# Altium PCB PCB.PcbDoc
Units mm, origin at the board's own origin, x right, y up, seen from the top; angles counter-clockwise.
Board outline 96.52 x 79.25 mm, 4 copper layers (Top Layer, Signal Layer 1, Signal Layer 2, Bottom Layer), stack 0.778 mm thick; 87 components, 59 nets, 444 pads, 159 vias.
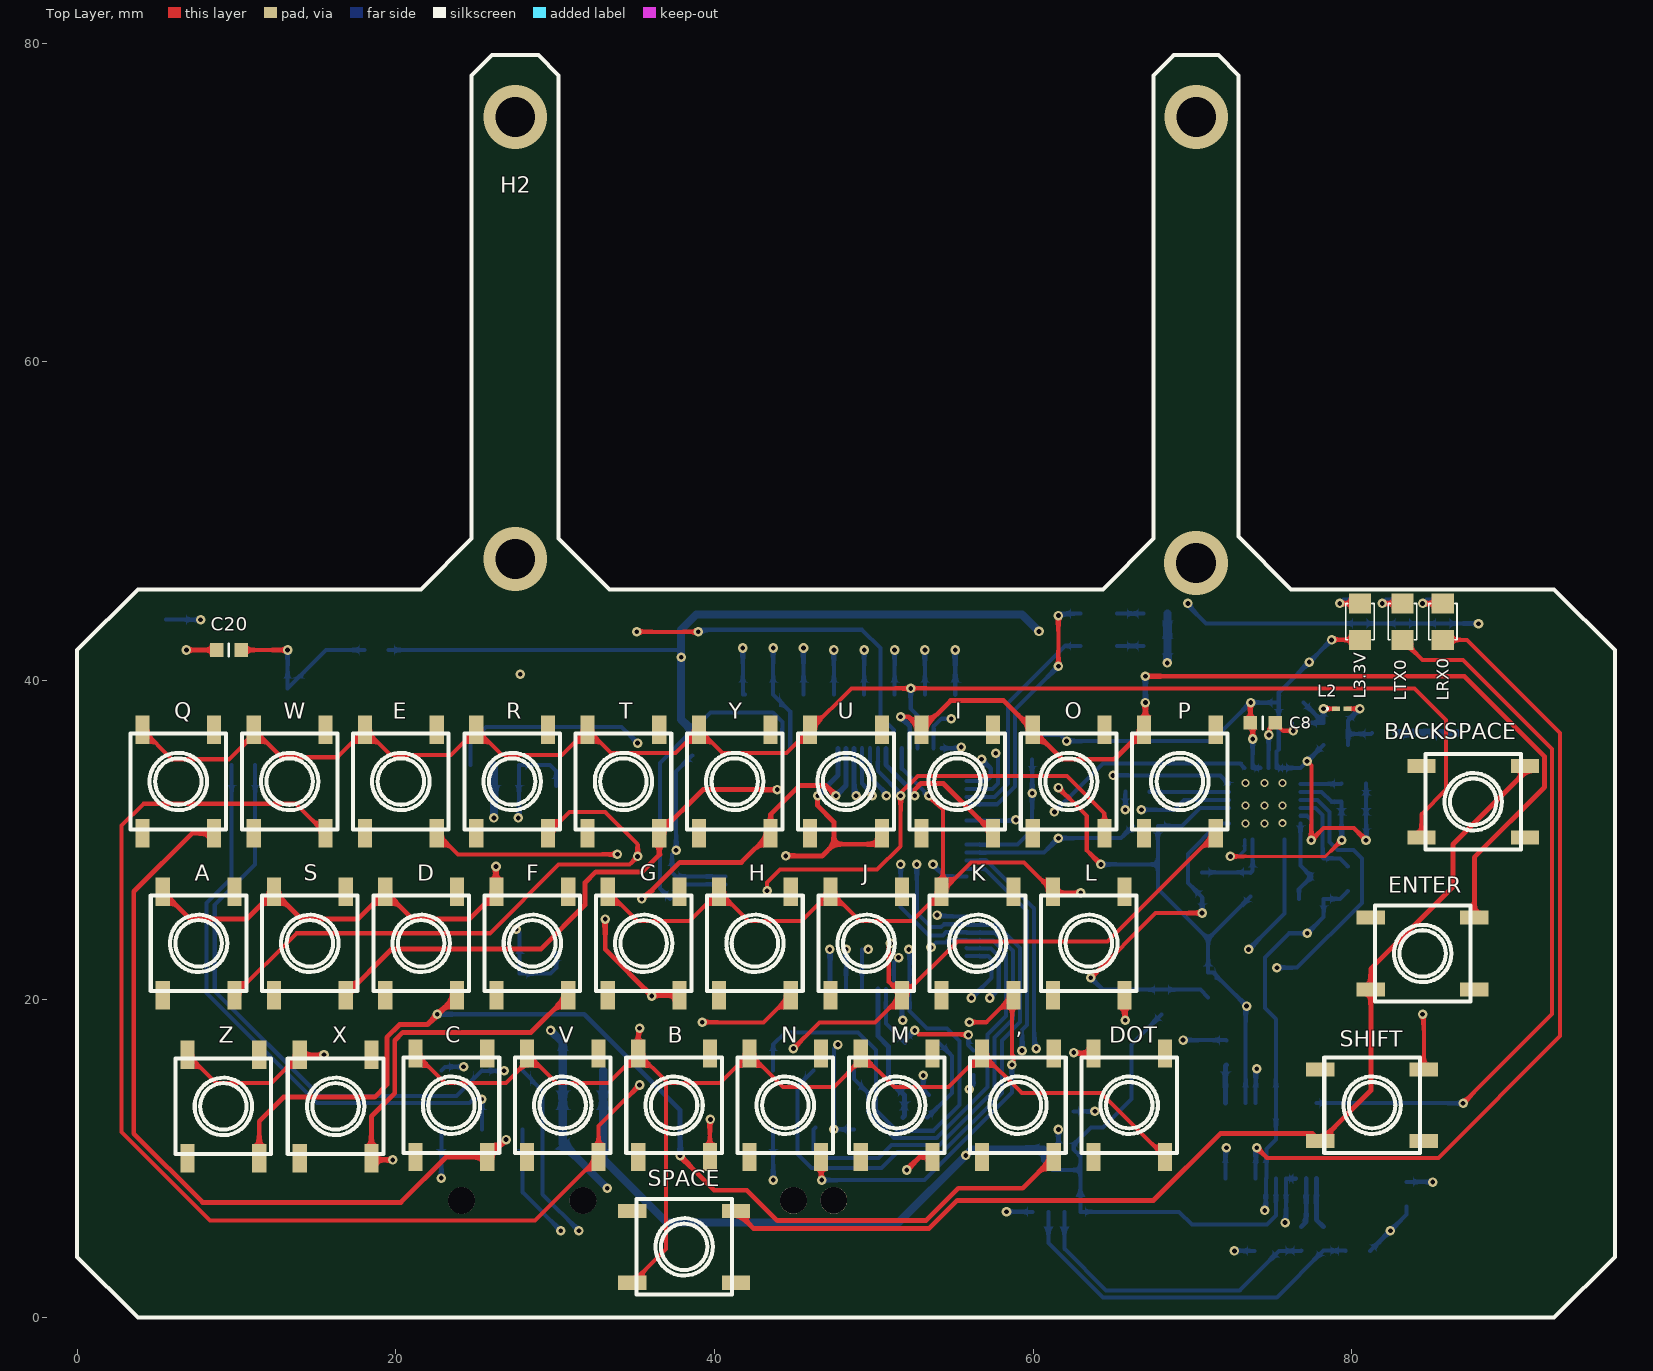
[diagram p0: Top Layer view]
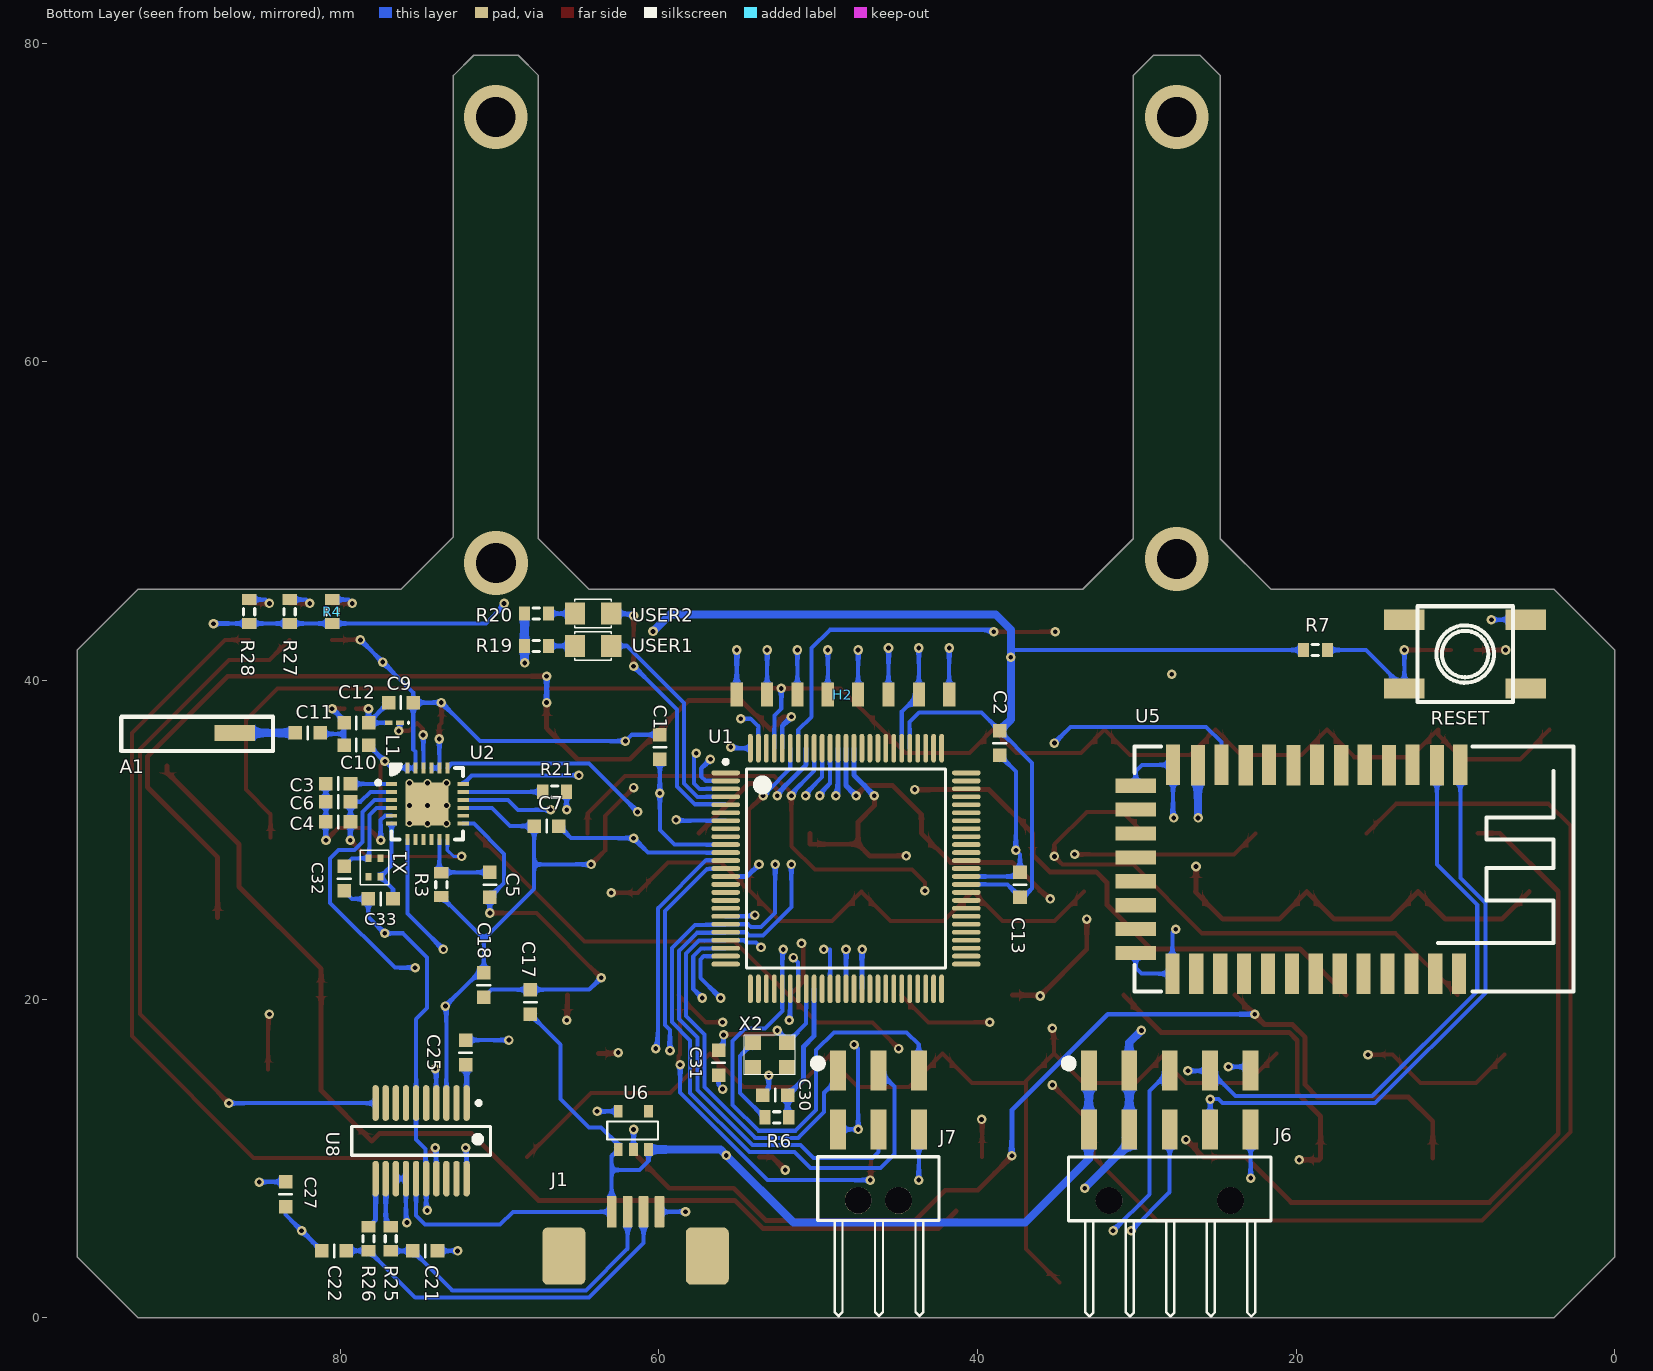
[diagram p1: Bottom Layer view, seen from below]
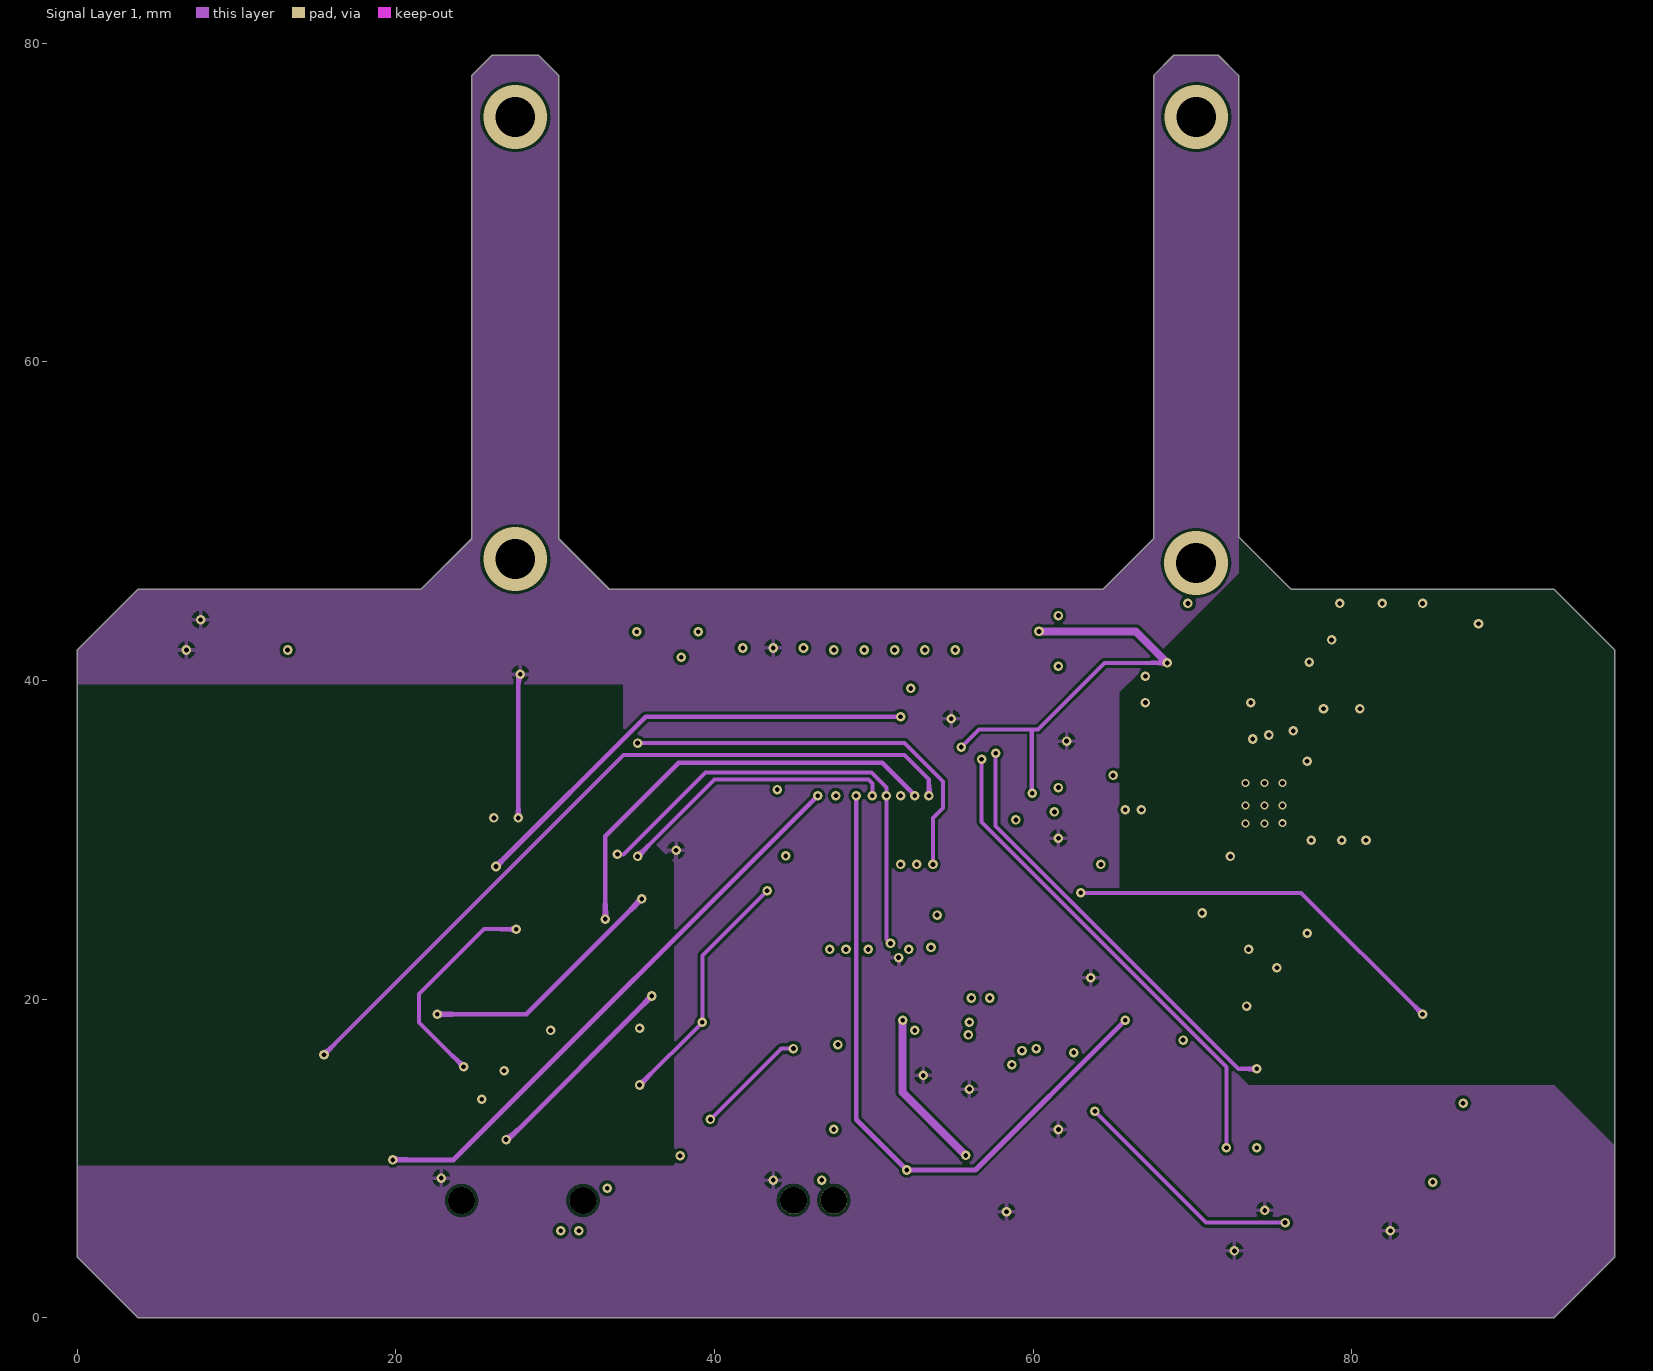
[diagram p2: Signal Layer 1]
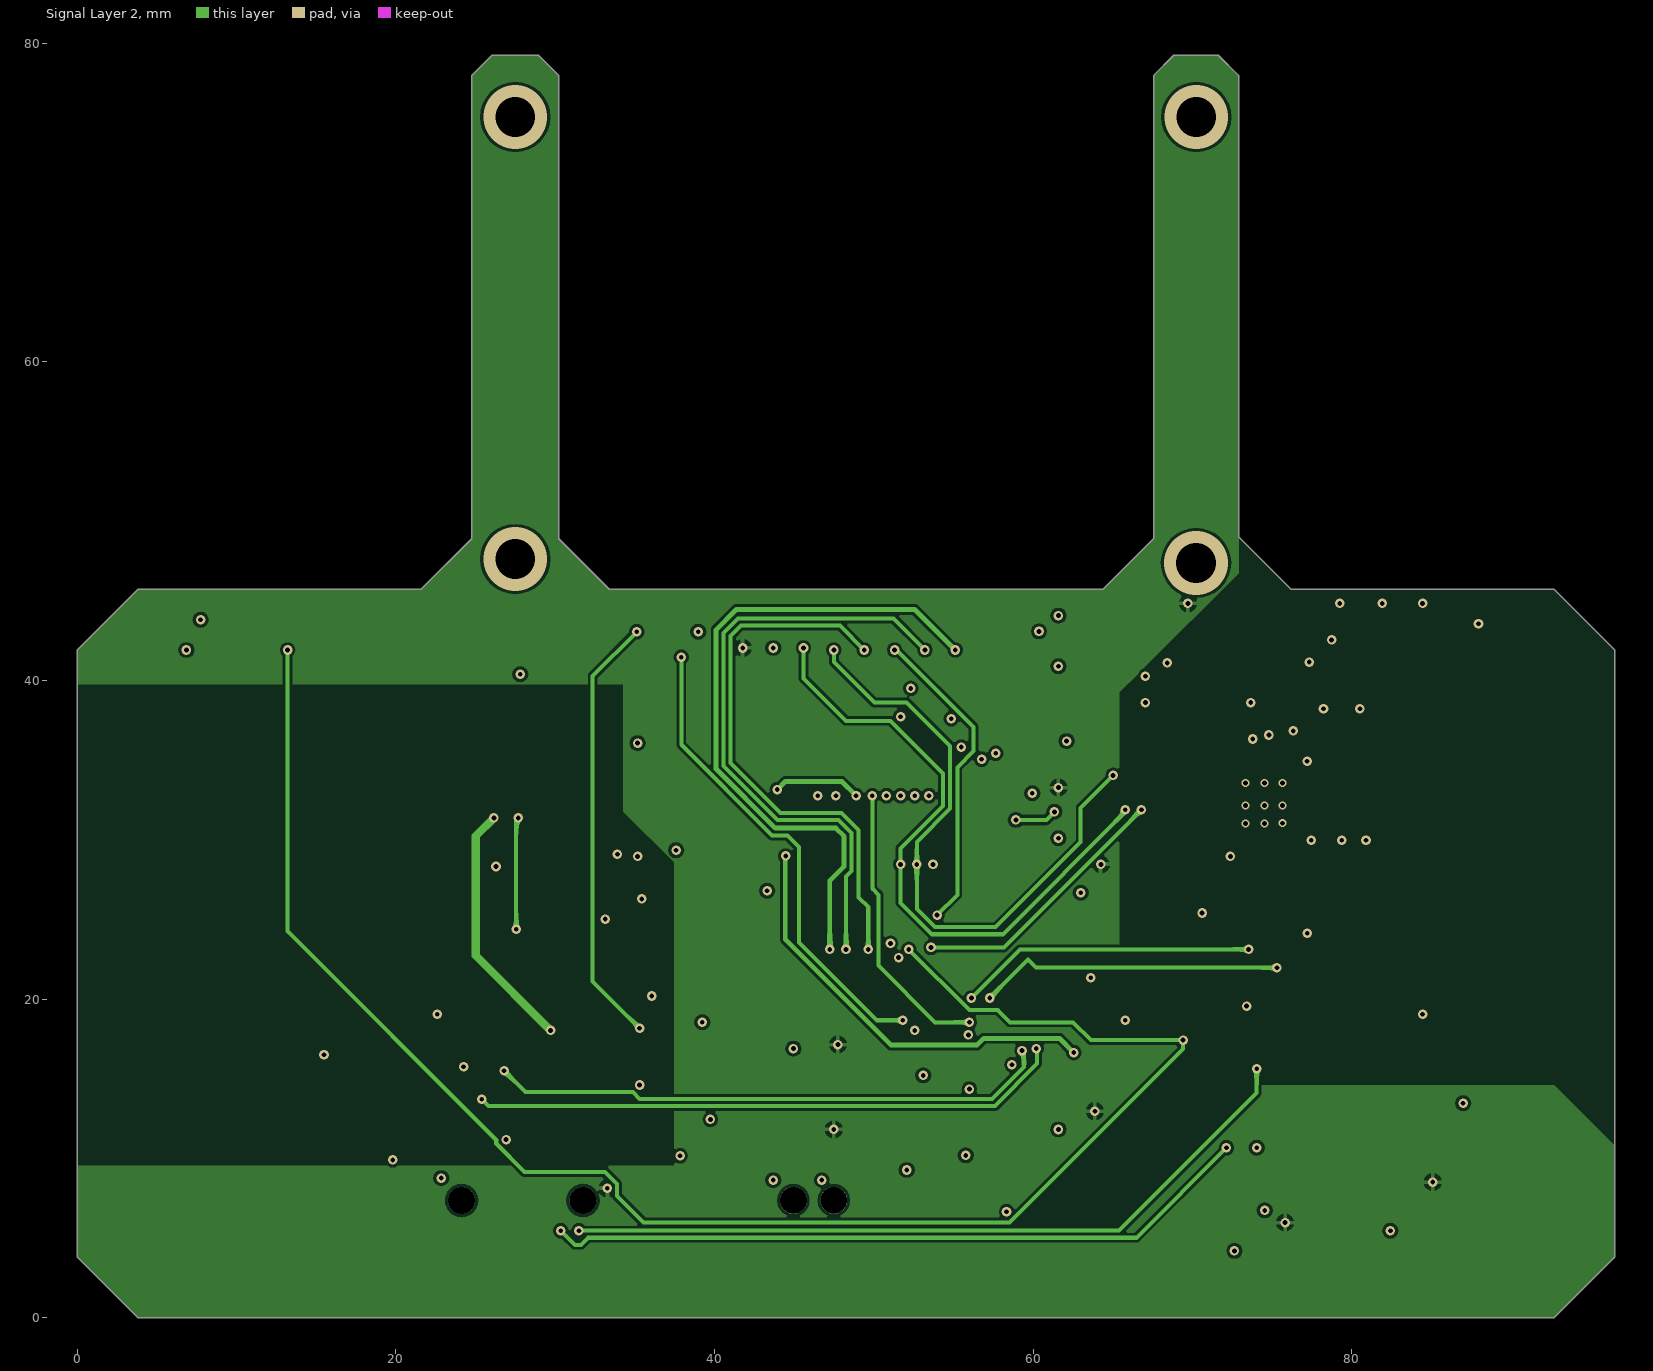
[diagram p3: Signal Layer 2]
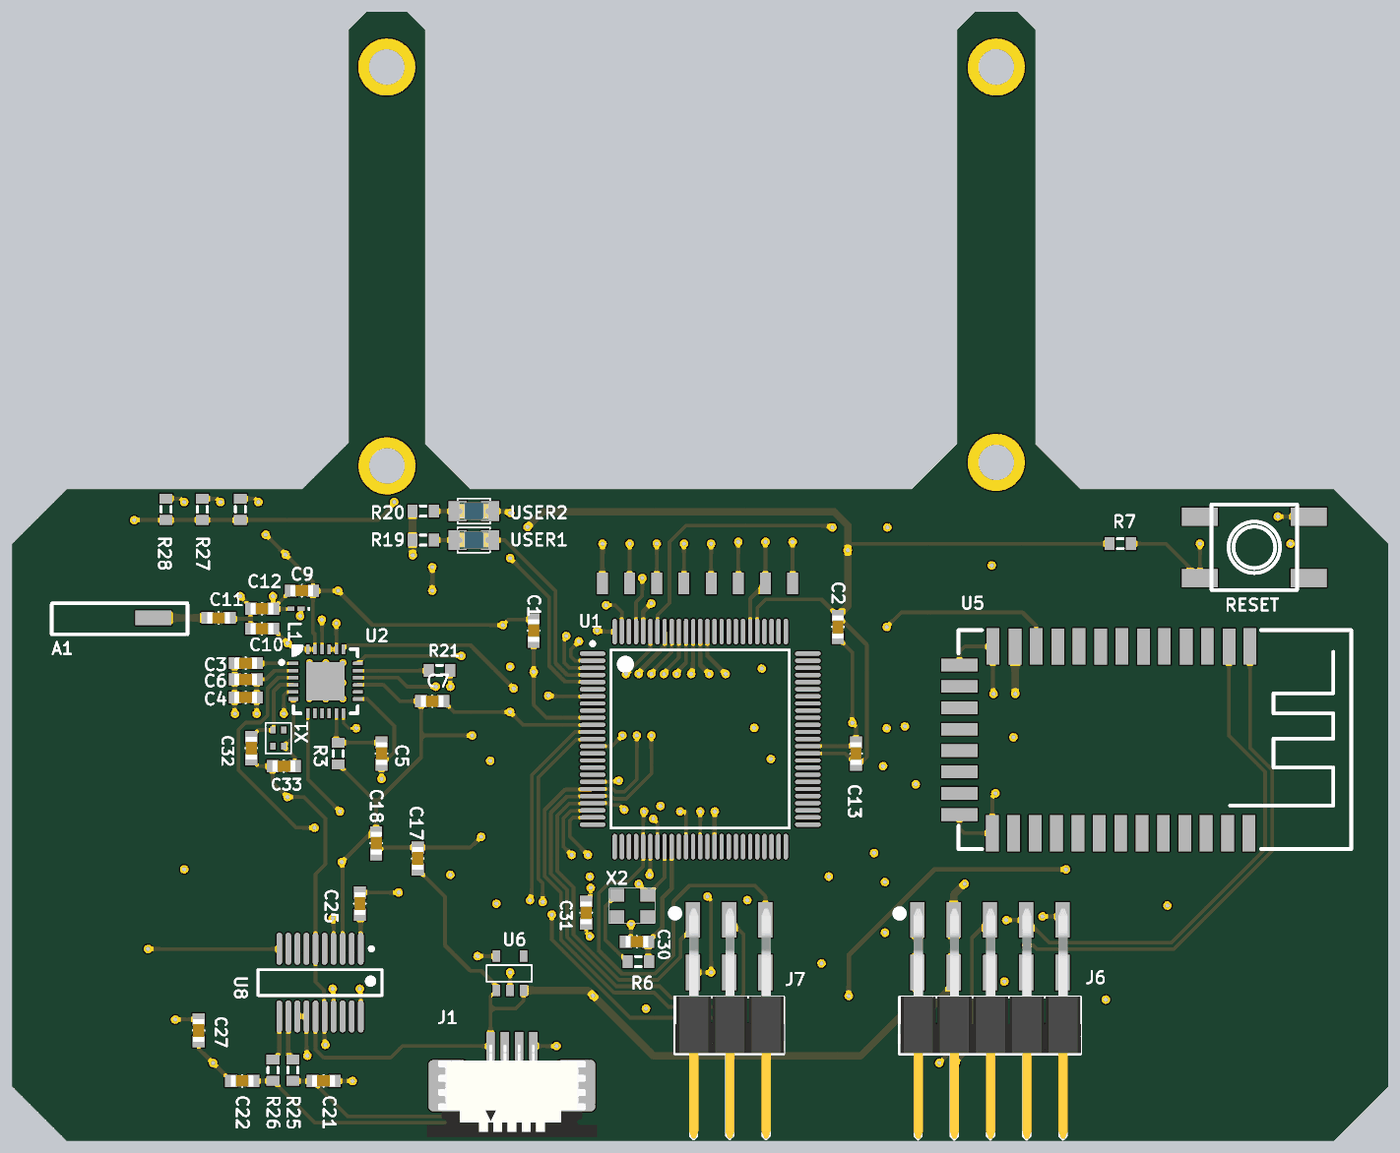
[diagram p4: 3D render of the assembled board from below, using the file's embedded part models]

## Layer stack, top to bottom
Top Solder: solder mask 0.0102, Solder Resist, Dk 3.5
Top Layer: signal copper 0.0356
Dielectric 1: core 0.254, FR-4, Dk 4.2
Signal Layer 1: signal copper 0.036
Dielectric 3: prepreg 0.127, Dk 4.2
Signal Layer 2: signal copper 0.036
Dielectric 2: core 0.254, Dk 4.2
Bottom Layer: signal copper 0.0356
Bottom Solder: solder mask 0.0102, Solder Resist, Dk 3.5

## Board outline
0,3.81 3.81,0 92.71,0 96.52,3.81 96.52,41.91 92.71,45.72 76.2,45.72 72.898,49.022 72.898,77.978 71.628,79.248 68.834,79.248 67.564,77.978 67.564,48.895 64.389,45.72 33.401,45.72 30.226,48.895 30.226,77.978 28.956,79.248 26.035,79.248 24.765,77.978 24.765,48.895 21.59,45.72 3.81,45.72 0,41.91

## Design rules (kind name [scope] priority, off if disabled: settings)
Clearance [All] p1: gap=0.191 ignorepadtopadclearanceinfootprint=FALSE except(0: Arc-Hole Track-Hole SMDPad-Hole THPad-Hole Via-Hole Fill-Hole Poly-Hole Region-Hole Text-Hole)
PolygonConnect [All] p1: connectstyle=Relief reliefconductorwidth=0.254 reliefentries=4 polygonreliefangle="90 Angle" airgapwidth=0.254
RoutingVias [All] p1: holewidth=0.3 width=1.27 viastyle="Through Hole" minholewidth=0.3 minwidth=0.45 maxholewidth=0.3 maxwidth=0.6
SolderMaskExpansion [All] p1: expansion=0.102
Width [All] p1: maxlimit=0.762 minlimit=0.203 preferedwidth=0.254 minimp=50.000000 maximp=50.000000 favimp=50.000000
30 further rules are at their usual default settings.

## Components (designator, comment, footprint, x,y, rotation, side; value= is the part's Value field where it differs from the comment)
, "SW" Kha_Button#1 59.055,13.335 r90 top value="Button chip 4 pin"
A "SW" Kha_Button#1 7.62,23.495 r90 top value="Button chip 4 pin"
A1 "Antenna" Antenna 88.773,34.925 r0 bottom
B "SW" Kha_Button#1 37.465,13.335 r90 top value="Button chip 4 pin"
BACKSPACE "SW" Kha_Button#1 87.63,32.385 r180 top value="Button chip 4 pin"
C "SW" Kha_Button#1 23.495,13.335 r90 top value="Button chip 4 pin"
C1 "approved sub OK" SMD-0603c 59.944,35.814 r180 bottom value=100nF
C2 "approved sub OK" SMD-0603c 38.608,36.068 r0 bottom value=100nF
C3 "approved sub OK" SMD-0603c 80.137,33.528 r270 bottom value=10nF
C4 "approved sub OK" SMD-0603c 80.137,31.115 r270 bottom value=10nF
C5 "approved sub OK" SMD-0603c 70.612,27.178 r0 bottom value=100nF
C6 "approved sub OK" SMD-0603c 80.137,32.385 r90 bottom value=470nF
C7 "approved sub OK" SMD-0603c 67.056,30.861 r270 bottom value=100nF
C8 "approved sub OK" SMD-0603c 74.422,37.338 r90 top value=0.8pF
C9 "approved sub OK" SMD-0603c 76.2,38.608 r270 bottom value=0.8pF
C10 "approved sub OK" SMD-0603c 78.994,35.941 r270 bottom value=0.8pF
C11 "approved sub OK" SMD-0603c 82.042,36.703 r90 bottom value=100pF
C12 "approved sub OK" SMD-0603c 78.994,37.338 r90 bottom value=0.5pF
C13 "approved sub OK" SMD-0603c 37.338,27.178 r180 bottom value=100nF
C17 "approved sub OK" SMD-0603c 68.072,19.812 r180 bottom value=104
C18 "approved sub OK" SMD-0603c 70.993,20.879 r180 bottom value=104
C20 "approved sub OK" SMD-0603c 9.525,41.91 r90 top value=22pF
C21 "approved sub OK" SMD-0603c 74.676,4.191 r270 bottom value=22pF
C22 "approved sub OK" SMD-0603c 80.391,4.191 r90 bottom value=22pF
C25 "approved sub OK" SMD-0603c 72.136,16.637 r180 bottom value=100nF
C27 "approved sub OK" SMD-0603c 83.439,7.747 r0 bottom value=22pF
C30 "approved sub OK" SMD-0603c 52.705,13.97 r90 bottom value=8pF
C31 "approved sub OK" SMD-0603c 56.261,16.002 r0 bottom value=8pF
C32 "approved sub OK" SMD-0603c 79.756,27.559 r180 bottom value=8pF
C33 "approved sub OK" SMD-0603c 77.47,26.289 r270 bottom value=8pF
D "SW" Kha_Button#1 21.59,23.495 r90 top value="Button chip 4 pin"
DOT "SW" Kha_Button#1 66.04,13.335 r270 top value="Button chip 4 pin"
E "SW" Kha_Button#1 20.32,33.655 r90 top value="Button chip 4 pin"
ENTER "SW" Kha_Button#1 84.455,22.86 r0 top value="Button chip 4 pin"
F "SW" Kha_Button#1 28.575,23.495 r90 top value="Button chip 4 pin"
G "SW" Kha_Button#1 35.56,23.495 r90 top value="Button chip 4 pin"
H "SW" Kha_Button#1 42.545,23.495 r90 top value="Button chip 4 pin"
H2 "EInk LCD Module" EInk_Module 47.498,39.116 r0 top
I "SW" Kha_Button#1 55.245,33.655 r90 top value="Button chip 4 pin"
J "SW" Kha_Button#1 49.53,23.495 r90 top value="Button chip 4 pin"
J1 "USB Micro Type B" ZIF_CONN_4P_TE84953-4 61.468,1.27 r180 bottom
J6 "10p" 610110249121 27.94,11.43 r180 bottom
J7 "06p" 610106249121 46.228,11.441 r180 bottom
K "SW" Kha_Button#1 56.515,23.495 r90 top value="Button chip 4 pin"
L "SW" Kha_Button#1 63.5,23.495 r90 top value="Button chip 4 pin"
L1 "Inductor" 0603 76.612,37.338 r0 bottom value=3nH
L2 "Inductor" 0603 79.375,38.227 r0 top value=2.5nH
L3.3V "LED SMD" SM-LED-0805-Blue 80.518,44.831 r270 top
LRX0 "LED SMD" SM-LED-0805-Blue 85.725,44.831 r270 top
LTX0 "LED SMD" SM-LED-0805-Blue 83.185,44.831 r270 top
M "SW" Kha_Button#1 51.435,13.335 r90 top value="Button chip 4 pin"
N "SW" Kha_Button#1 44.45,13.335 r90 top value="Button chip 4 pin"
O "SW" Kha_Button#1 62.23,33.655 r90 top value="Button chip 4 pin"
P "SW" Kha_Button#1 69.215,33.655 r90 top value="Button chip 4 pin"
Q "SW" Kha_Button#1 6.35,33.655 r90 top value="Button chip 4 pin"
R "SW" Kha_Button#1 27.305,33.655 r90 top value="Button chip 4 pin"
R3 "Res3" J1-0603 73.66,27.178 r270 bottom value=0
R4 "Res3" J1-0603 80.518,44.323 r90 bottom value=1K
R6 "Res3" J1-0603 52.603,12.573 r180 bottom value=27R
R7 "Res3" J1-0603 18.796,41.91 r0 bottom value=10K
R19 "Res3" J1-0603 67.691,42.164 r0 bottom value=1K
R20 "Res3" J1-0603 67.691,44.196 r0 bottom value=1K
R21 "Res3" J1-0603 66.548,33.02 r0 bottom value=50
R25 "Res3" J1-0603 76.835,4.953 r90 bottom value=27
R26 "Res3" J1-0603 78.232,4.953 r90 bottom value=27
R27 "Res3" J1-0603 83.185,44.323 r90 bottom value=1K
R28 "Res3" J1-0603 85.725,44.323 r90 bottom value=1K
RESET "SW" Kha_Button#2 9.398,41.656 r0 bottom value="Button chip 4 pin"
S "SW" Kha_Button#1 14.605,23.495 r90 top value="Button chip 4 pin"
SHIFT "SW" Kha_Button#1 81.28,13.335 r0 top value="Button chip 4 pin"
SPACE "SW" Kha_Button#1 38.1,4.445 r180 top value="Button chip 4 pin"
T "SW" Kha_Button#1 34.29,33.655 r90 top value="Button chip 4 pin"
U "SW" Kha_Button#1 48.26,33.655 r90 top value="Button chip 4 pin"
U1 "ATmega2560-16AU" 100A_N 48.26,28.194 r180 bottom
U2 "SX1280" "SX1280_QFN24 4x4" 74.651,32.537 r180 bottom
U5 "Bluetooth HM-12" HM-12 9.572,30.89 r270 bottom
U6 "AP2112 - SOT25" "AP2112 - SOT25" 61.595,11.811 r90 bottom
U8 "FT231XS-U" SSOP-20_N 74.93,11.1 r270 bottom
USER1 "LED SMD" SM-LED-0805-Blue 65.278,42.164 r180 bottom
USER2 "LED SMD" SM-LED-0805-Blue 65.278,44.196 r180 bottom
V "SW" Kha_Button#1 30.48,13.335 r90 top value="Button chip 4 pin"
W "SW" Kha_Button#1 13.335,33.655 r90 top value="Button chip 4 pin"
X "SW" Kha_Button#1 16.22,13.26 r90 top value="Button chip 4 pin"
X1 "52Mhz" "Crystal 52MHz" 77.851,28.194 r90 bottom value=4Mhz
X2 "16MHz" PCBComponent_1 53.086,16.51 r0 bottom value=4Mhz
Y "SW" Kha_Button#1 41.275,33.655 r90 top value="Button chip 4 pin"
Z "SW" Kha_Button#1 9.18,13.26 r90 top value="Button chip 4 pin"

## Footprints (in the part's own frame and the unit in brackets; to place one, negate y for a bottom-side part, rotate by r counter-clockwise, add the part's x,y. Pads: shape width x height; smd on the part's side, far side on the other; paste and mask are expansions set on the pad)
100A_N [mm] "Thin QFP, 100-Leads, Body 14x14mm, Pitch 0.5mm, IPC Medium Density"
  oval 1.8x0.3 smd: 1(-7.55,6) 2(-7.55,5.5) 3(-7.55,5) 4(-7.55,4.5) 5(-7.55,4) 6(-7.55,3.5) 7(-7.55,3) 8(-7.55,2.5) 9(-7.55,2) 10(-7.55,1.5) 11(-7.55,1) 12(-7.55,0.5) 13(-7.55,0) 14(-7.55,-0.5) 15(-7.55,-1) 16(-7.55,-1.5) 17(-7.55,-2) 18(-7.55,-2.5) 19(-7.55,-3) 20(-7.55,-3.5) 21(-7.55,-4) 22(-7.55,-4.5) 23(-7.55,-5) 24(-7.55,-5.5) 25(-7.55,-6) 51(7.55,-6) 52(7.55,-5.5) 53(7.55,-5) 54(7.55,-4.5) 55(7.55,-4) 56(7.55,-3.5) 57(7.55,-3) 58(7.55,-2.5) 59(7.55,-2) 60(7.55,-1.5) 61(7.55,-1) 62(7.55,-0.5) 63(7.55,0) 64(7.55,0.5) 65(7.55,1) 66(7.55,1.5) 67(7.55,2) 68(7.55,2.5) 69(7.55,3) 70(7.55,3.5) 71(7.55,4) 72(7.55,4.5) 73(7.55,5) 74(7.55,5.5) 75(7.55,6)
  oval 0.3x1.8 smd: 26(-6,-7.55) 27(-5.5,-7.55) 28(-5,-7.55) 29(-4.5,-7.55) 30(-4,-7.55) 31(-3.5,-7.55) 32(-3,-7.55) 33(-2.5,-7.55) 34(-2,-7.55) 35(-1.5,-7.55) 36(-1,-7.55) 37(-0.5,-7.55) 38(0,-7.55) 39(0.5,-7.55) 40(1,-7.55) 41(1.5,-7.55) 42(2,-7.55) 43(2.5,-7.55) 44(3,-7.55) 45(3.5,-7.55) 46(4,-7.55) 47(4.5,-7.55) 48(5,-7.55) 49(5.5,-7.55) 50(6,-7.55) 76(6,7.55) 77(5.5,7.55) 78(5,7.55) 79(4.5,7.55) 80(4,7.55) 81(3.5,7.55) 82(3,7.55) 83(2.5,7.55) 84(2,7.55) 85(1.5,7.55) 86(1,7.55) 87(0.5,7.55) 88(0,7.55) 89(-0.5,7.55) 90(-1,7.55) 91(-1.5,7.55) 92(-2,7.55) 93(-2.5,7.55) 94(-3,7.55) 95(-3.5,7.55) 96(-4,7.55) 97(-4.5,7.55) 98(-5,7.55) 99(-5.5,7.55) 100(-6,7.55)
  silkscreen extent -7.68,-6.25 6.25,6.82, body extent -7,-7 7,7, height 1.2
0603 [mm] "Chip Inductor, Body 0.6x0.3mm, IPC High Density"
  rect 0.5x0.3 smd: 1(-0.35,0) 2(0.35,0)
  silkscreen extent -0.9,-0.05 -0.9,0.05, body extent -0.33,-0.18 0.33,0.18, height 0.55
610106249121 [mm] "WR-PHD 2.54 mm Dual Pin Header 6 pins, dual pin, SMT horizontal, gold plating"
  rect 1x2.5 smd: 1(-2.54,4.075) 2(0,4.075) 3(2.54,4.075) 4(-2.54,0.375) 5(0,0.375) 6(2.54,0.375)
  round 1.68 hole 1.68 unplated: _1(1.27,-4.075) ""(-1.27,-4.075)
  silkscreen extent -4,-11.35 3.81,4.72, body extent -3.76,-11.29 3.86,4.87, height 5.14
610110249121 [mm] "WR-PHD 2.54 mm Dual Pin Header 10 pins, dual pin, SMT horizontal, gold plating"
  rect 1x2.5 smd: 1(-5.08,4.075) 2(-2.54,4.075) 3(0,4.075) 4(2.54,4.075) 5(5.08,4.075) 6(-5.08,0.375) 7(-2.54,0.375) 8(0,0.375) 9(2.54,0.375) 10(5.08,0.375)
  round 1.68 hole 1.68 unplated: _1(3.81,-4.075) ""(-3.81,-4.075)
  silkscreen extent -6.54,-11.35 6.35,4.72, body extent -6.3,-11.29 6.4,4.87, height 5.14
Antenna [mil]
  rect 100x40 smd: 1(-85,-70)
  silkscreen extent -179,-110 196,-25
"AP2112 - SOT25" [mm]
  rect 0.8x0.55 smd: 1(-1.257,0.96) 2(-1.257,0.01) 3(-1.257,-0.94) 4(1.143,-0.94) 5(1.143,0.96)
  silkscreen extent -0.64,-1.52 0.51,1.65
"Crystal 52MHz" [mm]
  rect 0.47x0.37 smd: 1(-0.508,-0.381) 2(0.635,-0.381) 3(0.635,0.381) 4(-0.508,0.381)
  silkscreen extent -1.02,-0.89 1.14,0.89
EInk_Module [mil]
  rect 30x60 smd far side: 1(-225,0) 2(-150,0) 3(-75,0) 4(0,0) 5(75,0) 6(150,0) 7(225,0) 8(300,0)
HM-12 [mm]
  rect 2.54x0.889 smd: 1(-3.81,-0.127) 2(-3.8,-1.6) 3(-3.81,-3.127) 4(-3.8,-4.6) 5(-3.81,-6.127) 6(-3.8,-7.6) 7(-3.81,-9.127) 8(-3.8,-10.6) 9(-3.81,-12.127) 10(-3.8,-13.6) 11(-3.81,-15.127) 12(-3.8,-16.6) 13(-3.81,-18.161) 22(9.3,-18.2) 23(9.3,-16.7) 24(9.3,-15.2) 25(9.3,-13.7) 26(9.3,-12.2) 27(9.3,-10.7) 28(9.3,-9.2) 29(9.3,-7.7) 30(9.3,-6.2) 31(9.3,-4.7) 32(9.3,-3.2) 33(9.3,-1.7) 34(9.3,-0.2)
  rect 0.889x2.54 smd: 14(-2.5,-20.5) 15(-1,-20.5) 16(0.5,-20.5) 17(2,-20.5) 18(3.5,-20.5) 19(5,-20.5) 20(6.5,-20.5) 21(8,-20.5)
  silkscreen extent -4.95,-20.57 10.41,6.97
J1-0603 [mm] "Chip Resistor, Body 1.6x0.8mm, IPC High Density"
  rect 0.7x0.9 smd: 1(-0.75,0) 2(0.75,0)
  silkscreen extent -0.2,-0.35 0.2,0.35, body extent -0.85,-0.48 0.85,0.48, height 0.9
Kha_Button#1 [mm] "SW button 4pin, 250 x250 mil"
  rect 1.778x0.889 smd: 1(-3.25,2.25) 2(3.25,2.25) 3(-3.25,-2.25) 4(3.25,-2.25)
  silkscreen extent -3,-3 3,3
Kha_Button#2 [mm] "SW button 4pin, 250 x250 mil"
  rect 2.54x1.27 smd: 1(-3.81,2.159) 2(3.81,2.159) 3(-3.81,-2.159) 4(3.81,-2.159)
  silkscreen extent -3,-3 3,3
PCBComponent_1 [mm]
  rect 1x0.9 smd: 1(-1.118,-0.737) 2(1.016,-0.737) 3(1.016,0.787) 4(-1.118,0.787)
  silkscreen extent -1.65,-1.22 1.55,1.27
SM-LED-0805-Blue [mil]
  rect 50x55 smd: 1(0,0) 2(90,0)
  silkscreen extent 0,-35 90,35, body extent 5,-25 85,25, height 43
SMD-0603c [mm]
  rect 0.85x0.85 smd: 1(0,0.775) 2(0,-0.775)
  silkscreen extent -0.4,0 0.4,0, body extent -0.4,-0.8 0.4,0.8, height 0.9
SSOP-20_N [mm] "SOP, 20-Leads, Body 8.6x3.9mm, Pitch 0.635mm, IPC Medium Density"
  oval 2.25x0.4 smd: 1(-2.375,2.858) 2(-2.375,2.223) 3(-2.375,1.588) 4(-2.375,0.953) 5(-2.375,0.318) 6(-2.375,-0.317) 7(-2.375,-0.952) 8(-2.375,-1.587) 9(-2.375,-2.222) 10(-2.375,-2.857) 11(2.375,-2.858) 12(2.375,-2.223) 13(2.375,-1.588) 14(2.375,-0.953) 15(2.375,-0.318) 16(2.375,0.317) 17(2.375,0.952) 18(2.375,1.587) 19(2.375,2.222) 20(2.375,2.857)
  silkscreen extent -2.5,-4.35 0.9,4.35, body extent -1.99,-4.37 1.99,4.37, height 1.76
"SX1280_QFN24 4x4" [mm] "TQFN, 20-Leads, Body 4.00x4.00mm, Pitch 0.50mm, Thermal Pad 2.90x2.90mm, IPC Medium Density"
  rect 0.7x0.25 smd: 1(-2.136,0.968) 2(-2.136,0.468) 3(-2.136,-0.032) 4(-2.136,-0.532) 5(-2.136,-1.032) 6(-2.136,-1.532) 13(2.364,-1.532) 14(2.364,-1.032) 15(2.364,-0.532) 16(2.364,-0.032) 17(2.364,0.468) 18(2.364,0.968)
  rect 0.25x0.7 smd: 7(-1.136,-2.532) 8(-0.636,-2.532) 9(-0.136,-2.532) 10(0.364,-2.532) 11(0.864,-2.532) 12(1.364,-2.532) 19(1.364,1.968) 20(0.864,1.968) 21(0.364,1.968) 22(-0.136,1.968) 23(-0.636,1.968) 24(-1.136,1.968)
  rect 2.7x2.7 smd: 21_1(0.102,-0.279)
  silkscreen extent -3.1,-2.53 2.36,2.2, body extent -1.95,-2.33 2.15,1.77, height 0.8
ZIF_CONN_4P_TE84953-4 [mm] "TE Connectivity 4-pin ZIF connector"
  round 0.5 on Mech15: 0(0,0)
  rrect25% 0.61x2 smd: 1(-1.5,5.375) 2(-0.5,5.375) 3(0.5,5.375) 4(1.5,5.375)
  rrect25% 2.7x3.6 smd: MH(4.5,2.6) MH_1(-4.5,2.6)
  body extent -5.96,-1.04 5.96,5.51, height 2.58

## Part data
, A B BACKSPACE C D DOT E ENTER F G H I J K L M N O P Q R RESET S SHIFT SPACE T U V W X Y Z: library part SW4, "Switch button 4 pin"
C1 C2 C3 C4 C5 C6 C7 C8 C9 C10 C11 C12 C13 C17 C18 C20 C21 C22 C25 C27 C30 C31 C32 C33: library part CAPC_1n_0603_X7R_100V_10%, "Capacitor SMD Cer 1nF 10% 100V X7R 0603", Manufacturer 1="Murata Electronics North America", Manufacturer Part Number 1=GCM188R72A102KA37D, Operating Temperature="-55°C ~ 125°C", Package / Case="0603 (1608 metric)", Ratings="100V; X7R", Supplier Part Number 1=490-4780-1-ND, Tolerance=±10%, ComponentLink1Description=http://search.murata.co.jp/Ceramy/image/img/PDF/ENG/GCM188R72A102KA37.pdf, ComponentLink1URL=http://search.murata.co.jp/Ceramy/image/img/PDF/ENG/GCM188R72A102KA37.pdf, Material=ceramic, SCDType=spec, Size / Dimension="0.063\" L x 0.031\" W (1.60mm x 0.80mm)", Supplier 1=Digi-Key, Thickness (Max)="0.035\" (0.90mm)"
H2: library part "E-Ink LCD"
J1: library part USB_Micro_TypeB, "Connector SMD USB Micro Type B middle mount", Manufacturer 1="Molex Inc", Manufacturer Part Number 1=47491-0001, Package / Case=SMD, Supplier Part Number 1=WM17142CT-ND, SCDType=undef, Supplier 1=Digi-Key
J6: library part 610110249121, "WR-PHD 2.54 mm Pin Header - SMT Type Double Row Right Angled, 10p", ComponentLink1Description=Manufacturer, ComponentLink1URL=http://www.we-online.de, ComponentLink2Description=Datasheet, ComponentLink2URL=http://katalog.we-online.de/em/datasheet/6101xx249121.pdf, PartNumber=610110249121, PinNumber=10p, PublishedDate="July 2016", Publisher="Wurth Elektronik"
J7: library part 610106249121, "WR-PHD 2.54 mm Pin Header - SMT Type Double Row Right Angled, 06p", ComponentLink1Description=Manufacturer, ComponentLink1URL=http://www.we-online.de, ComponentLink2Description=Datasheet, ComponentLink2URL=http://katalog.we-online.de/em/datasheet/6101xx249121.pdf, PartNumber=610106249121, PinNumber=06p, PublishedDate="July 2016", Publisher="Wurth Elektronik"
L3.3V LRX0 LTX0 USER1 USER2: library part LED-SMD-0805
R3 R4 R6 R7 R19 R20 R21 R25 R26 R27 R28: "Resistor", LatestRevisionDate=29-May-2009, LatestRevisionNote="IPC-7351 Footprint Added.", PackageDescription="Chip Resistor", PackageReference=J1-0603, Published=8-Jun-2000, Publisher="Altium Limited"
U1: "8-bit AVR Microcontroller, 4.5-5.5V, 256KB Flash, 4KB EEPROM, 8KB SRAM, 86 GPIO pins, 100-pin TQFP, Industrial Grade (-40°C to 85°C), Pb-Free", Supplier Part Number 1=ATMEGA2560-16AU-ND, Code_JEDEC=MS-026-AED, ComponentLink1Description="Manufacturer Link", ComponentLink1URL=http://www.atmel.com/products/avr/default.asp?, ComponentLink2Description="ATmega640/1280/1281/2560/2561 Datasheet", ComponentLink2URL=http://www.atmel.com/dyn/resources/prod_documents/doc2549.pdf, ComponentLink3Description="ATmega640/1280/1281/2560/2561 Summary", ComponentLink3URL=http://www.atmel.com/dyn/resources/prod_documents/2549S.pdf, ComponentLink4Description="Atmel.com Home", ComponentLink4URL=http://www.atmel.com, DatasheetVersion="revL, Aug-2007", PackageDescription="100-Pin Thin Profile Plastic Quad Flat Pack (TQFP), 14 x 14 x 1.0 mm Body, 0.5 mm Pitch", PackageReference=100A, PackageVersion="revC, Oct-2001", Published=1-Apr-2010, Publisher="Altium Limited", Supplier 1=Digi-Key, Supplier 2=Farnell, Supplier 3=Farnell, Supplier 4=Mouser, Supplier Part Number 2=1288330, Supplier Part Number 3=1661740, Supplier Part Number 4=556-ATMEGA2560-16AU
U5: library part HM-12
U8: "USB to Full-Handshake UART Interface Chip, UHCI/OHCI/EHCI Compatible, USB 2.0 Compatible, -40 to +85 degC, 20-Pin SSOP, Pb-Free, Tube", Manufacturer=FTDI, Code_JEDEC=MO-137-AD, ComponentLink1Description="Manufacturer URL", ComponentLink1URL=http://www.ftdichip.com/, ComponentLink2Description=Datasheet, ComponentLink2URL=http://www.ftdichip.com/Support/Documents/DataSheets/ICs/DS_FT231X.pdf, ComponentLink3Description="FT231X Product Page", ComponentLink3URL=www.ftdichip.com/Products/ICs/FT231X.html, DatasheetVersion="ver 1.2, Feb-2013", PackageDescription="20-Pin Small Outline Package, 8.6 x 3.9 mm Body, 0.635 mm Pitch", PackageReference=SSOP-20, PackageVersion=Feb-13, PartNumber=FT231XS-U
X1 X2: library part XT2, "Crystal For all Crystal 2pin."
L1 L2: Code_IEC=1005, Code_JEITA=0402, LatestRevisionDate=29-May-2009, LatestRevisionNote="IPC-7351 Footprint Added.", PackageDescription="Chip Inductor", PackageReference=0402-A, Published=8-Jun-2000, Publisher="Altium Limited"

## Via types
v1: diameter 0.6, hole 0.3, Top Layer to Bottom Layer, 146 vias
v2: diameter 0.5, hole 0.3, Top Layer to Bottom Layer, 9 vias
v3: diameter 4, hole 2.5, Top Layer to Bottom Layer, 4 vias

## Nets (pads, with @x,y where several pads share a name; then routed paths per layer and width w, separated by ;. In a path a pad name is that pad's centre, name@x,y a point inside that pad or via, vN(x,y) a via of type N, cw(c..) or ccw(c..) an arc to the next point about the centre after c; other vN are vias at no path point)
3.3V: C7.2 C18.1 C27.2 H2.1 J6.2 J6.7 J7.4 R3.2 R4.1 R27.1 R28.1 U2.15 U5.12 U6.5 U8.3 U8.13 U8.14 | length 118.4
  Top Layer w0.254: v1(61.595,33.274) 63.373,31.496 63.373,29.337 v1(64.262,28.448)
  Signal Layer 1 w0.254: v1(63.881,12.954) 70.866,5.969 v1(75.819,5.969)
  Signal Layer 2 w0.508: v1(26.162,31.369) 25.019,30.226 25.019,22.733 v1(29.718,18.034)
  Bottom Layer w0.254: v1(41.783,42.037) H2.1 H2.1@41.91,39.116 ; v1(47.752,17.145) 47.493,16.886 v1(47.493,11.816) J7.4 ; U6.5 v1(63.881,12.954) ; v1(64.262,28.448) 67.831,28.448 ; v1(69.723,44.831) 69.723,44.704 70.854,43.573 R4.1 R27.1 R28.1 87.948,43.573 v1(87.96,43.561) ; U2.15 70.486,32.005 69.342,30.861 C7.2 67.831,28.448 ; U8.3 73.343,19.494 v1(73.406,19.558) 71.31,21.654 C18.1 70.993,23.761 ; R3.2 70.993,23.761 ; v1(75.819,5.969) 75.882,6.032 U8.14 U8.13 ; C27.2 85.077,8.522 v1(85.09,8.509) ; 67.831,28.448 67.831,26.923 70.993,23.761
  Bottom Layer w0.508: v1(26.162,31.369) 26.172,31.379 U5.12 ; v1(29.718,18.034) 30.48,17.272 J6.2 J6.7 30.48,10.922 v1(33.274,8.128)
5V: C1.2 C2.2 C13.2 C17.2 J1.1 J6.1 J6.6 R7.2 R19.2 R20.2 U1.10 U1.31 U1.61 U1.80 U1.100 U6.1 U6.3 U8.15 | length 225.9
  Signal Layer 1 w0.254: v1(55.499,35.814) 56.617,36.932 59.919,36.932 ; v1(59.944,32.917) 59.919,32.942 59.919,36.932 ; v1(68.428,41.097) 64.491,41.097 60.325,36.932 59.919,36.932
  Signal Layer 1 w0.508: v1(51.816,18.669) 51.816,14.148 v1(55.778,10.185) ; v1(60.376,43.078) 66.446,43.078 v1(68.428,41.097)
  Signal Layer 2 w0.254: v1(37.922,41.453) 37.922,35.962 43.62,30.264 44.59,30.264 45.314,29.54 45.314,23.55 50.195,18.669 v1(51.816,18.669)
  Bottom Layer w0.254: R7.2 22.479,41.91 37.846,41.91 37.897,41.859 ; U1.61 38.129,27.194 C13.2 37.224,26.289 36.576,26.937 36.576,34.811 C2.2 39.763,37.998 43.663,37.998 44.26,37.401 U1.80 ; U1.31 51.76,18.725 v1(51.816,18.669) ; U1.100 55.429,35.744 v1(55.499,35.814) ; U1.10 59.031,29.694 59.944,30.607 v1(59.944,32.917) C1.2 ; U6.3 60.655,9.83 61.214,9.271 62.968,9.271 ; C17.2 66.167,17.132 66.167,13.716 64.389,11.938 63.627,11.938 62.555,10.866 U6.1 62.968,10.141 62.968,9.271 ; U8.15 75.248,6.413 74.676,5.842 69.977,5.842 69.174,6.645 J1.1 62.968,9.271
  Bottom Layer w0.508: J6.1 J6.6 33.02,9.957 37.008,5.969 51.562,5.969 v1(55.778,10.185) 56.147,10.554 U6.3 ; v1@37.897,41.453 37.897,37.554 C2.2 ; v1(37.922,41.453) 37.897,41.478 37.897,41.859 37.897,43.18 38.862,44.145 59.309,44.145 v1(60.376,43.078) ; v1(68.428,41.097) 68.441,41.111 R19.2 R20.2
AHREF: U1.98
COL1: C.3 G.3 I.3 Q.3 U1.93 | length 107.1
  Top Layer w0.305: Q.3 7.212,30.405 3.556,26.749 3.556,11.557 7.874,7.239 20.32,7.239 23.166,10.085 C.3 25.833,10.085 v1(26.924,11.176) ; v1(33.147,25.019) 33.147,23.114 v1(36.068,20.193) 36.12,20.245 G.3 ; v1(52.578,32.766) 52.578,33.147 52.959,33.528 54.372,33.528 I.3
  Signal Layer 1 w0.305: v1(26.924,11.176) 27.051,11.176 v1(36.068,20.193) ; v1(33.147,25.019) 33.147,30.226 37.757,34.836 50.528,34.836 52.578,32.786 v1(52.578,32.766)
  Bottom Layer w0.305: U1.93 50.76,34.711 52.578,32.893 v1(52.578,32.766)
COL2: H.3 O.3 U1.92 V.3 W.3 | length 126.8
  Top Layer w0.254: W.3 13.732,32.258 4.17,32.258 2.794,30.882 2.794,11.654 8.352,6.096 28.741,6.096 V.3 32.73,12.029 v1(35.306,14.605) ; v1(39.243,18.542) 43.092,18.542 H.3 ; v1(43.307,26.797) 43.307,27.305 44.12,28.118 50.216,28.118 51.689,29.591 v1(51.689,32.766) 51.689,32.923 52.764,33.998 62.141,33.998 64.48,31.659 O.3
  Signal Layer 1 w0.254: v1(35.306,14.605) v1(39.243,18.542) 39.243,22.733 v1(43.307,26.797)
  Bottom Layer w0.254: U1.92 50.26,34.322 51.689,32.893 v1(51.689,32.766)
COL3: B.3 E.3 J.3 P.3 U1.91 | length 89.8
  Top Layer w0.254: E.3 23.892,29.083 v1(33.909,29.083) ; B.3 39.715,12.41 v1(39.751,12.446) ; v1(44.958,16.891) 46.609,18.542 50.077,18.542 J.3 ; v1(51.054,23.495) 50.945,23.386 50.945,21.08 J.3 ; P.3 64.682,23.622 55.245,23.622 51.868,20.245 J.3
  Signal Layer 1 w0.254: v1(33.909,29.083) 34.29,29.083 39.433,34.227 49.847,34.227 50.8,33.274 v1(50.8,32.766) 50.8,23.749 v1(51.054,23.495) ; v1(39.751,12.446) 44.196,16.891 v1(44.958,16.891)
  Bottom Layer w0.254: U1.91 49.76,33.933 50.8,32.893 v1(50.8,32.766)
COL4: A.3 K.3 N.3 R.3 U1.90 | length 100.8
  Top Layer w0.254: A.3 13.755,24.13 25.908,24.13 30.226,28.448 34.671,28.448 v1(35.179,28.956) 35.179,29.718 33.147,31.75 30.9,31.75 R.3 ; N.3 46.7,8.672 v1(46.736,8.636) ; v1(56.007,18.542) 57.062,18.542 K.3@58.692,20.171 ; v1(58.674,15.875) 58.765,15.966 58.765,16.435 58.692,16.508 K.3@58.692,20.171 ; K.3 K.3@58.692,20.171
  Signal Layer 1 w0.254: v1(35.179,28.956) 40.005,33.782 49.663,33.782 49.911,33.534 v1(49.911,32.766)
  Signal Layer 2 w0.254: v1(49.911,32.766) 49.911,26.924 50.292,26.543 50.292,22.098 53.848,18.542 v1(56.007,18.542)
  Bottom Layer w0.254: v1(46.736,8.636) 53.187,8.636 58.674,14.123 v1(58.674,15.875) ; U1.90 49.26,33.544 49.911,32.893 v1(49.911,32.766)
COL5: L.3 M.3 S.3 T.3 U1.89 | length 88.6
  Top Layer w0.305: S.3 19.762,23.152 29.121,23.152 31.877,25.908 31.877,27.305 32.55,27.978 35.471,27.978 36.576,29.083 36.54,29.119 T.3 39.282,33.147 v1(43.942,33.147) ; v1(52.07,9.271) 52.884,10.085 M.3 ; L.3 65.75,18.705 v1(65.786,18.669)
  Signal Layer 1 w0.305: v1(48.895,32.766) 48.903,32.758 48.903,12.438 v1(52.07,9.271) 56.388,9.271 v1(65.786,18.669)
  Signal Layer 2 w0.305: v1(43.942,33.147) 44.45,33.655 48.006,33.655 v1(48.895,32.766)
  Bottom Layer w0.305: U1.89 48.76,32.901 v1(48.895,32.766)
COL6: ,.3 D.3 U1.88 Y.3 Z.3 | length 102.3
  Top Layer w0.305: Z.3 11.43,12.319 12.954,13.843 18.669,13.843 19.444,14.618 19.444,17.604 20.242,18.402 21.997,18.402 D.3 ; v1(35.433,26.289) 35.536,26.289 37.822,28.575 41.695,28.575 Y.3 43.525,31.587 45.347,33.409 46.982,33.409 v1(47.625,32.766) ; v1(37.846,10.16) 38.928,9.078 38.928,9.054 39.981,8.001 42.037,8.001 43.942,6.096 53.275,6.096 55.307,8.128 59.348,8.128 61.305,10.085
  Signal Layer 1 w0.305: v1(22.606,19.05) 28.194,19.05 v1(35.433,26.289)
  Bottom Layer w0.305: v1(22.606,19.05) 31.826,19.05 37.846,13.03 v1(37.846,10.16) ; v1(47.625,32.766) 48.26,33.401 U1.88
COL7: DOT.3 F.3 U1.87 U.3 X.3 | length 99.5
  Top Layer w0.305: v1(19.812,9.906) 18.574,9.906 X.3 18.47,12.628 19.939,14.097 19.939,17.399 20.447,17.907 28.487,17.907 F.3 ; v1(44.475,28.981) 46.761,28.981 47.498,29.718 ; v1(46.482,32.766) 46.482,32.131 47.498,31.115 47.498,29.718 ; U.3 50.51,29.718 47.498,29.718 ; v1(62.556,16.637) 62.608,16.585 DOT.3
  Signal Layer 1 w0.305: v1(19.812,9.906) 23.622,9.906 v1(46.482,32.766)
  Signal Layer 2 w0.305: v1(44.475,28.981) 44.45,28.956 44.45,23.749 51.09,17.109 56.479,17.109 56.904,17.534 61.659,17.534 v1(62.556,16.637)
  Bottom Layer w0.305: v1(46.482,32.766) 47.76,34.044 U1.87
COL8: BACKSPACE.3 ENTER.3 SHIFT.3 SPACE.3 | length 68.7
  Top Layer w0.305: SPACE.3 42.457,5.588 53.467,5.588 55.245,7.366 67.564,7.366 71.755,11.557 77.558,11.557 SHIFT.3 81.205,14.26 ENTER.3 81.205,21.896 86.36,27.051 86.36,29.718 90.88,34.238 BACKSPACE.3
DTR: C25.2 U8.1 | length 2.4
  Bottom Layer w0.305: U8.1 72.072,15.799 C25.2
GND: C1.1 C2.1 C3.2 C4.2 C5.1 C6.1 C7.1 C8.1 C9.1 C10.1 C13.1 C17.1 C18.2 C20.1 C21.1 C22.1 C27.1 C30.1 C31.1 C32.2 C33.2 H2.2 J1.4 J6.5 J6.10 J7.6 L3.3V.2 RESET.3 U1.11 U1.32 U1.62 U1.81 U1.99 U2.5 U2.13 U2.20 U2.21 U2.23 U2.24 U5.13 U5.14 U5.21 U5.22 U6.2 U8.6 U8.16 | length 197.5
  Top Layer w0.254: v1(6.858,41.91) C20.1 ; v1(63.627,21.336) 67.691,25.4 v1(70.612,25.4) ; v1(73.66,38.608) 73.647,38.595 C8.1 73.787,37.198 v1(73.787,36.322) ; v1(77.203,34.925) 77.47,34.658 v1(77.47,29.972) 78.232,30.734 80.137,30.734 v1(80.899,29.972) ; v1(78.74,42.545) L3.3V.2
  Signal Layer 1 w0.254: v1(24.257,15.748) 21.463,18.542 21.463,20.32 25.527,24.384 v1(27.559,24.384) ; v1(27.686,31.369) 27.686,40.259 v1(27.813,40.386)
  Signal Layer 2 w0.254: v1(27.559,24.384) 27.559,31.242 v1(27.686,31.369)
  Bottom Layer w0.254: RESET.3 v1(7.747,43.815) ; v1(22.86,8.763) J6.10 ; J6.5 23.103,15.748 v1(24.257,15.748) ; v1(27.559,24.384) 27.772,24.171 U5.22 29.718,21.59 30.072,21.944 U5.21 ; v1(27.686,31.369) 27.733,31.416 U5.13 29.689,34.7 30.072,34.317 U5.14 ; C2.1 37.592,34.277 v1(37.592,29.337) 37.338,29.083 C13.1 37.597,27.694 U1.62 ; v1(43.688,8.636) J7.6 ; v1(43.688,42.037) H2.2 44.76,38.044 U1.81 ; U1.32 51.26,22.304 v1(51.562,22.606) ; v1(53.112,15.206) 53.112,14.338 C30.1 ; U1.99 53.76,37.123 54.229,37.592 v1(54.864,37.592) ; U1.11 60.69,29.194 v1(61.595,30.099) 65.519,30.099 C7.1 ; v1(56.007,14.351) 56.261,14.605 C31.1 ; v1(58.334,6.645) J1.4 ; C1.1 61.709,36.589 v1(62.103,36.195) 71.247,36.195 v1(73.66,38.608) C9.1 ; v1(61.595,11.811) 61.605,11.801 U6.2 ; v1(63.627,21.336) 64.376,20.587 C17.1 70.51,20.587 C18.2 ; v1(70.612,25.4) C5.1 69.723,27.292 69.723,29.107 71.621,31.005 U2.13 ; v1(72.644,4.191) C21.1 ; v1(73.787,36.322) U2.20 U2.21 ; v1(74.549,6.731) 74.612,6.794 U8.16 74.658,8.771 74.658,10.587 75.248,11.176 U8.6 75.248,18.732 74.549,19.431 74.549,22.606 76.073,24.13 v1(77.216,24.13) 78.245,25.159 C33.2 79.261,26.289 C32.2 ; U2.5 77.211,31.505 77.47,31.246 v1(77.47,29.972) ; C10.1 v1(77.203,34.925) 76.783,34.505 U2.24 U2.23 75.287,35.536 75.425,35.674 C9.1 ; v1(78.74,42.545) v1(77.343,41.148) 75.425,39.23 C9.1 ; v1(80.899,29.972) 80.912,29.985 C4.2 C6.1 C3.2 ; C22.1 v1(82.429,5.455) 83.439,6.464 C27.1
HM-12-RESET: U1.14 U5.11 | length 40.8
  Signal Layer 1 w0.254: v1(35.179,36.068) 51.943,36.068 54.356,33.655 54.356,32.004 53.721,31.369 v1(53.721,28.448)
  Bottom Layer w0.254: U5.11 24.699,36.129 25.654,37.084 34.163,37.084 v1(35.179,36.068) ; v1(53.721,28.448) 54.475,27.694 U1.14
LCD_BUSY: H2.8 U1.40 | length 47.9
  Signal Layer 2 w0.305: v1(47.244,23.114) 47.244,27.432 48.141,28.329 48.141,30.218 47.625,30.734 43.815,30.734 40.107,34.442 40.107,43.178 41.379,44.45 52.578,44.45 v1(55.118,41.91)
  Bottom Layer w0.305: v1(47.244,23.114) 47.26,23.098 U1.40 ; H2.8 v1(55.118,41.91)
LCD_CE0: H2.5 U1.36 | length 40.4
  Signal Layer 2 w0.254: v1(49.403,41.91) 47.879,43.434 41.656,43.434 41.021,42.799 41.021,34.821 44.156,31.686 47.966,31.686 49.055,30.597 49.055,26.383 49.657,25.781 v1(49.657,23.114)
  Bottom Layer w0.254: U1.36 49.26,23.098 49.276,23.114 v1(49.657,23.114) ; H2.5 v1(49.403,41.91)
LCD_CS: H2.6 U1.19 | length 24.4
  Signal Layer 2 w0.254: v1(51.308,41.91) 51.419,41.91 56.261,37.068 56.261,35.56 55.245,34.544 55.245,26.543 v1(53.975,25.273)
  Bottom Layer w0.254: H2.6 v1(51.308,41.91) ; v1(53.975,25.273) 54.054,25.194 U1.19
LCD_RESET: H2.7 U1.38 | length 44.7
  Signal Layer 2 w0.254: v1(48.26,23.114) 48.26,27.686 48.611,28.037 48.611,30.413 47.782,31.242 43.972,31.242 40.576,34.637 40.576,42.983 41.472,43.878 51.244,43.878 v1(53.213,41.91)
  Bottom Layer w0.254: U1.38 v1(48.26,23.114) ; H2.7 v1(53.213,41.91)
MISO: J7.1 U1.22 U2.16 | length 49.1
  Signal Layer 2 w0.254: v1(53.594,23.241) 58.166,23.241 v1(66.802,31.877)
  Bottom Layer w0.254: J7.1 48.768,14.986 49.632,14.122 49.632,12.917 51.258,11.29 53.956,11.29 57.15,14.484 57.15,17.78 58.293,18.923 58.293,22.847 57.479,23.661 55.843,23.661 U1.22 54.676,23.694 54.54,23.558 53.911,23.558 v1(53.594,23.241) ; v1(66.802,31.877) 68.841,31.877 69.469,32.505 U2.16
MOSI: H2.3 J7.5 R21.1 U1.21 | length 79.8
  Signal Layer 2 w0.254: v1(45.593,42.037) 45.593,40.132 48.26,37.465 51.054,37.465 54.356,34.163 54.356,32.131 51.689,29.464 v1(51.689,28.448) 51.689,26.041 53.664,24.066 58.102,24.066 65.786,31.75 v1(65.786,31.877)
  Bottom Layer w0.254: H2.3 v1(45.593,42.037) ; J7.5@46.355,11.943 J7.5 46.228,10.414 46.609,10.033 50.292,10.033 51.105,10.846 54.14,10.846 57.594,14.3 57.594,17.596 58.737,18.739 58.737,23.031 57.607,24.162 55.842,24.162 U1.21 54.547,24.194 54.356,24.003 53.467,24.003 51.689,25.781 v1(51.689,28.448) ; v1(65.786,31.877) 65.798,31.889 R21.1
NetA1_1: A1.1 C11.1 | length 3.8
  Bottom Layer w0.508: C11.1 A1.1
NetC3_1: C3.1 U2.1 | length 2.6
  Bottom Layer w0.254: U2.1 79.339,33.505 C3.1
NetC4_1: C4.1 C6.2 U2.2 U2.12 | length 14.4
  Top Layer w0.203: v1(72.39,28.956) 78.359,28.956 v1(79.375,29.972)
  Bottom Layer w0.203: v1(72.39,28.956) 72.898,28.956 73.287,29.345 U2.12
  Bottom Layer w0.254: U2.2 78.12,33.005 78.74,32.385 C6.2 C4.1 79.362,29.985 v1(79.375,29.972)
NetC5_2: C5.2 R3.1 U2.11 | length 5.2
  Bottom Layer w0.254: C5.2 73.635,27.953 R3.1 73.787,28.055 U2.11
NetC8_2: C8.2 L1.1 U2.22 | length 4.9
  Top Layer w0.254: v1(74.803,36.576) 74.803,36.944 C8.2 75.705,36.83 v1(76.327,36.83)
  Bottom Layer w0.254: U2.22 74.787,36.56 v1(74.803,36.576) ; L1.1 76.262,36.895 v1(76.327,36.83)
NetC9_2: C9.2 C12.2 L1.2 L2.1 | length 4.7
  Top Layer w0.254: v1(78.232,38.227) L2.1
  Bottom Layer w0.254: L1.2 C12.2 C12.2@78.219,37.364 ; C9.2 C12.2@78.219,37.364 ; v1(78.232,38.227) 78.219,38.214 C12.2@78.219,37.364
NetC10_2: C10.2 C11.2 C12.1 L2.2 | length 4.9
  Top Layer w0.254: L2.2 v1(80.518,38.227)
  Bottom Layer w0.254: C10.2 79.769,36.639 ; v1(80.518,38.227) 79.769,37.478 C12.1 79.769,36.639 ; C11.2 81.203,36.639 79.769,36.639
NetC32_1: C32.1 U2.4 X1.3 | length 6.1
  Bottom Layer w0.254: U2.4 77.729,32.005 78.175,31.559 78.175,28.886 X1.3 79.261,28.829 C32.1
NetC33_1: C33.1 U2.6 X1.1 | length 5.3
  Bottom Layer w0.254: C33.1 76.695,26.911 X1.1 76.787,28.369 U2.6
NetL3.3V_1: L3.3V.1 R4.2 | length 2.6
  Top Layer w0.254: v1(79.248,44.831) L3.3V.1
  Bottom Layer w0.254: v1(79.248,44.831) 79.49,45.073 R4.2
NetLRX0_1: LRX0.1 R28.2 | length 2.6
  Top Layer w0.254: v1(84.455,44.831) LRX0.1
  Bottom Layer w0.254: v1(84.455,44.831) 84.697,45.073 R28.2
NetLRX0_2: LRX0.2 U8.17 | length 53.3
  Top Layer w0.254: v1(74.041,10.668) 74.676,10.033 85.446,10.033 93.091,17.678 93.091,36.703 87.249,42.545 LRX0.2
  Bottom Layer w0.254: U8.17 73.977,10.604 v1(74.041,10.668)
NetLTX0_1: LTX0.1 R27.2 | length 2.6
  Top Layer w0.254: v1(81.915,44.831) LTX0.1
  Bottom Layer w0.254: v1(81.915,44.831) 82.157,45.073 R27.2
NetLTX0_2: LTX0.2 U8.10 | length 46
  Top Layer w0.254: LTX0.2 84.455,41.275 86.995,41.275 92.583,35.687 92.583,19.05 v1(86.995,13.462)
  Bottom Layer w0.254: U8.10 77.8,13.462 v1(86.995,13.462)
NetR6_1: R6.1 X2.2 | length 5.7
  Bottom Layer w0.254: R6.1@53.328,12.573 R6.1 53.382,12.573 54.92,14.11 54.92,16.429 X2.2
NetR19_1: R19.1 USER1.1 | length 1.7
  Bottom Layer w0.254: USER1.1 R19.1
NetR20_1: R20.1 USER2.1 | length 1.7
  Bottom Layer w0.254: USER2.1 R20.1
NetR21_2: R21.2 U2.17 | length 5
  Bottom Layer w0.254: R21.2 67.313,33.005 U2.17
NetR25_2: R25.2 U8.12 | length 3.2
  Bottom Layer w0.305: R25.2 77.153,6.02 U8.12
NetR26_2: R26.2 U8.11 | length 3.2
  Bottom Layer w0.305: U8.11 77.787,6.148 R26.2
NetU1_4: U1.4 USER1.2 | length 14.1
  Bottom Layer w0.254: U1.4 57.586,32.694 58.42,33.528 58.42,38.592 61.992,42.164 USER1.2
NetU1_5: U1.5 USER2.2 | length 16.8
  Top Layer w0.254: v1(61.595,40.894) v1(61.595,44.069)
  Bottom Layer w0.254: U1.5 55.843,32.227 57.747,32.227 58.864,33.344 58.864,38.163 v1(61.595,40.894) ; v1(61.595,44.069) 61.722,44.196 USER2.2
RESET: C20.2 C25.1 J7.3 R7.1 RESET.2 U1.30 | length 151.4
  Top Layer w0.254: C20.2 v1(13.208,41.91)
  Signal Layer 2 w0.254: v1(13.208,41.91) 13.208,24.257 26.307,11.158 26.307,10.92 28.083,9.144 33.131,9.144 33.891,8.384 33.891,7.638 35.56,5.969 58.531,5.969 69.418,16.856 v1(69.418,17.424) 63.627,17.424 62.509,18.542 58.547,18.542 57.785,19.304 56.007,19.304 v1(52.197,23.114)
  Bottom Layer w0.254: v1(13.208,41.91) RESET.2 15.621,41.91 R7.1 ; J7.3 43.688,17.145 44.45,17.907 49.022,17.907 50.14,16.789 50.14,13.038 51.443,11.735 53.764,11.735 55.372,13.343 55.372,17.376 54.587,18.161 53.34,18.161 52.26,19.241 U1.30 52.26,23.051 v1(52.197,23.114) ; v1(69.418,17.424) 72.124,17.424 C25.1
RF_CTS: U1.7 U2.19 | length 19.1
  Signal Layer 2 w0.254: v1(58.928,31.242) 60.833,31.242 v1(61.341,31.75)
  Bottom Layer w0.254: U1.7 58.88,31.194 v1(58.928,31.242) ; v1(61.341,31.75) 64.389,34.798 72.994,34.798 U2.19
ROW1: BACKSPACE.2 E.2 Q.2 R.2 T.2 U1.97 U.2 W.2 Y.2 | length 103.9
  Top Layer w0.254: Q.2 5.953,35.052 9.525,35.052 11.085,36.612 W.2 12.811,35.179 16.383,35.179 16.383,35.218 E.2 19.669,35.306 23.456,35.306 R.2 26.654,35.306 30.441,35.306 T.2 33.512,35.433 37.553,35.433 Y.2 40.497,35.433 44.538,35.433 U.2 48.602,39.497 v1(52.324,39.497) 83.947,39.497 85.928,37.516 85.928,33.147 84.38,31.599 BACKSPACE.2
  Bottom Layer w0.254: v1(52.324,39.497) 52.324,38.227 52.76,37.791 U1.97
ROW2: A.2 D.2 ENTER.2 F.2 I.2 O.2 P.2 S.2 U1.96 | length 119.5
  Top Layer w0.305: A.2 7.096,25.019 10.629,25.019 S.2 14.081,25.019 17.614,25.019 D.2 21.066,25.019 24.599,25.019 F.2 26.289,26.781 v1(26.289,28.321) ; v1(51.689,37.719) 52.181,37.719 I.2 54.825,38.735 58.15,38.735 O.2 61.833,35.052 65.112,35.052 P.2 67.056,36.996 v1(67.056,38.608) ; v1(67.056,40.259) 87.074,40.259 92.112,35.222 92.112,33.311 87.705,28.904 ENTER.2
  Signal Layer 1 w0.305: v1(26.289,28.321) 35.687,37.719 v1(51.689,37.719)
  Bottom Layer w0.305: v1(51.689,37.719) 52.26,37.148 U1.96 ; v1(67.056,38.608) v1(67.056,40.259)
ROW3: G.2 H.2 J.2 K.2 L.2 SHIFT.2 U1.95 X.2 Z.2 | length 131.2
  Top Layer w0.254: Z.2 8.708,14.732 12.192,14.732 X.2 v1(15.494,16.51) ; G.2 35.163,24.892 38.442,24.892 H.2 42.148,24.892 45.466,24.892 47.28,26.706 J.2 49.133,24.892 52.412,24.892 K.2 K.2@54.338,26.818 ; v1(53.467,32.766) 54.338,31.895 K.2@54.338,26.818 ; v1(62.992,26.67) 61.325,26.67 L.2 59.42,28.575 56.095,28.575 K.2@54.338,26.818 ; v1(84.455,19.05) 84.53,18.975 SHIFT.2
  Signal Layer 1 w0.254: v1(15.494,16.51) 34.29,35.306 51.943,35.306 53.467,33.782 v1(53.467,32.766) ; v1(62.992,26.67) 76.835,26.67 v1(84.455,19.05)
  Bottom Layer w0.254: U1.95 51.76,34.457 53.195,33.022 53.195,32.911
ROW4: ,.2 B.2 C.2 DOT.2 M.2 N.2 SPACE.2 U1.94 V.2 | length 123.3
  Top Layer w0.254: C.2 23.098,14.732 26.924,14.732 28.23,16.038 V.2 30.083,14.732 33.362,14.732 B.2 ; SPACE.2 36.957,4.302 36.957,14.843 ; v1(35.128,43.053) v1(38.989,43.053) ; v1(35.306,18.161) 35.215,18.07 B.2 ; DOT.2 64.278,14.097 59.293,14.097 56.805,16.585 54.698,14.478 51.292,14.478 M.2 49.185,16.165 47.498,14.478 44.307,14.478 N.2 40.347,14.732 37.068,14.732 36.957,14.843 ; B.2 36.957,14.843
  Signal Layer 2 w0.254: v1(35.128,43.053) 32.36,40.284 32.36,21.107 v1(35.306,18.161)
  Bottom Layer w0.254: v1(38.989,43.053) 39.116,43.18 49.276,43.18 50.419,42.037 50.419,37.719 51.26,36.878 U1.94
RXD0: J6.8 U1.2 U8.20 | length 87.7
  Signal Layer 1 w0.254: v1(56.769,35.052) 56.769,31.115 72.136,15.748 v1(72.136,10.668)
  Signal Layer 2 w0.254: v1(30.353,5.461) 31.242,4.572 31.623,4.572 32.067,5.016 66.484,5.016 v1(72.136,10.668)
  Bottom Layer w0.254: J6.8 27.94,7.874 v1(30.353,5.461) ; U1.2 57.062,33.694 57.347,33.979 57.347,34.474 v1(56.769,35.052) ; U8.20 72.072,10.604 v1(72.136,10.668)
RXD2: J6.9 U1.12 U5.1 | length 89.1
  Signal Layer 2 w0.254: v1(25.4,13.716) 25.827,13.289 57.606,13.289 60.261,15.945 60.261,16.828 v1(60.198,16.891)
  Bottom Layer w0.254: U5.1 9.699,27.6 8.128,26.029 8.128,20.377 15.043,13.462 24.638,13.462 24.892,13.716 v1(25.4,13.716) J6.9 J6.9@25.4,12.319 ; U1.12 55.818,28.702 57.067,28.702 60.071,25.698 60.071,17.018 v1(60.198,16.891)
SCK: H2.4 J7.2 U1.20 U2.18 | length 90.6
  Signal Layer 2 w0.254: v1(47.498,41.91) 47.498,41.148 50.038,38.608 52.07,38.608 54.8,35.877 54.8,31.947 52.705,29.851 v1(52.705,28.448) 52.705,25.654 53.848,24.511 57.658,24.511 62.992,29.845 62.992,32.004 v1(65.024,34.036)
  Bottom Layer w0.254: J7.2 45.212,14.5 45.212,10.287 46.101,9.398 50.495,9.398 51.498,10.401 54.324,10.401 58.039,14.116 58.039,17.412 59.182,18.555 59.182,23.215 57.736,24.662 55.842,24.662 U1.20 54.412,24.694 54.229,24.511 53.594,24.511 52.705,25.4 v1(52.705,28.448) ; H2.4 v1(47.498,41.91) ; v1(65.024,34.036) 71.756,34.036 U2.18
SX1280_BUSY: U1.24 U2.7 | length 31.1
  Signal Layer 2 w0.254: v1(56.134,20.066) 59.182,23.114 v1(73.533,23.114)
  Bottom Layer w0.254: U1.24 57.189,22.694 57.404,22.479 57.404,21.336 v1(56.134,20.066) ; v1(73.533,23.114) 75.787,25.368 U2.7
SX1280_RESET: U1.23 U2.3 | length 40.6
  Signal Layer 2 w0.254: v1(57.277,20.066) 59.69,22.479 60.198,21.971 v1(75.311,21.971)
  Bottom Layer w0.254: U1.23 55.842,23.162 57.35,23.162 57.848,22.663 57.848,20.637 v1(57.277,20.066) ; v1(75.311,21.971) 76.581,21.971 80.645,26.035 80.645,28.829 80.119,29.355 79.119,29.355 78.619,29.854 78.619,31.744 77.858,32.505 U2.3
TXD0: J6.3 U1.3 U8.4 | length 92.7
  Signal Layer 1 w0.254: v1(57.658,35.433) 57.658,30.861 72.898,15.621 v1(74.041,15.621)
  Signal Layer 2 w0.254: v1(31.496,5.461) 65.405,5.461 74.041,14.097 v1(74.041,15.621)
  Bottom Layer w0.254: J6.3 29.21,14.235 29.21,7.747 v1(31.496,5.461) ; U1.3 57.457,33.194 57.791,33.528 57.791,35.3 v1(57.658,35.433) ; U8.4 73.977,15.557 v1(74.041,15.621)
TXD2: J6.4 U1.13 U5.2 | length 85.9
  Signal Layer 2 w0.254: v1(26.797,15.494) 28.13,14.16 34.877,14.16 35.304,13.734 57.422,13.734 59.436,15.748 59.436,16.637 v1(59.309,16.764)
  Bottom Layer w0.254: U5.2 11.172,28.444 8.636,25.908 8.636,20.498 15.227,13.906 23.801,13.906 J6.4 25.411,15.494 v1(26.797,15.494) ; U1.13 55.842,28.162 56.979,28.162 59.627,25.514 59.627,18.371 59.309,18.053 v1(59.309,16.764)
USB_D+: C22.2 J1.3 R26.1 | length 23.2
  Bottom Layer w0.254: J1.3 60.968,4.699 64.397,1.27 75.299,1.27 R26.1 79.604,4.203 C22.2
USB_D-: C21.2 J1.2 R25.1 | length 19.3
  Bottom Layer w0.254: J1.2 61.968,4.328 64.581,1.714 72.974,1.714 C21.2 76.823,4.191 R25.1
XTAL1: C30.2 R6.2 U1.34 | length 8.8
  Bottom Layer w0.305: U1.34 50.26,17.685 50.927,17.018 50.927,14.973 C30.2 51.93,12.675 R6.2@51.828,12.573
XTAL2: C31.2 U1.33 X2.1 | length 9.5
  Top Layer w0.254: v1(52.578,18.034) 52.82,17.792 55.904,17.792 v1(55.944,17.752)
  Bottom Layer w0.254: U1.33 50.76,18.455 X2.1 51.968,17.424 v1(52.578,18.034) ; v1(55.944,17.752) 55.944,17.094 C31.2
pads on no net: ,.1 ,.4 A.1 A.4 B.1 B.4 BACKSPACE.1 BACKSPACE.4 C.1 C.4 D.1 D.4 DOT.1 DOT.4 E.1 E.4 ENTER.1 ENTER.4 F.1 F.4 G.1 G.4 H.1 H.4 I.1 I.4 J1.0 J1.MH J1.MH_1 J6. J6._1 J7. J7._1 J.1 J.4 K.1 K.4 L.1 L.4 M.1 M.4 N.1 N.4 O.1 O.4 P.1 P.4 Q.1 Q.4 R.1 R.4 RESET.1 RESET.4 S.1 S.4 SHIFT.1 SHIFT.4 SPACE.1 SPACE.4 T.1 T.4 U1.1 U1.6 U1.8 U1.9 U1.15 U1.16 U1.17 U1.18 U1.25 U1.26 U1.27 U1.28 U1.29 U1.35 U1.37 U1.39 U1.41 U1.42 U1.43 U1.44 U1.45 U1.46 U1.47 U1.48 U1.49 U1.50 U1.51 U1.52 U1.53 U1.54 U1.55 U1.56 U1.57 U1.58 U1.59 U1.60 U1.63 U1.64 U1.65 U1.66 U1.67 U1.68 U1.69 U1.70 U1.71 U1.72 U1.73 U1.74 U1.75 U1.76 U1.77 U1.78 U1.79 U1.82 U1.83 U1.84 U1.85 U1.86 U2.8 U2.9 U2.10 U2.14 U2.21_1 U5.3 U5.4 U5.5 U5.6 U5.7 U5.8 U5.9 U5.10 U5.15 U5.16 U5.17 U5.18 U5.19 U5.20 U5.23 U5.24 U5.25 U5.26 U5.27 U5.28 U5.29 U5.30 U5.31 U5.32 U5.33 U5.34 U6.4 U8.2 U8.5 U8.7 U8.8 U8.9 U8.18 U8.19 U.1 U.4 V.1 V.4 W.1 W.4 X1.2 X1.4 X2.3 X2.4 X.1 X.4 Y.1 Y.4 Z.1 Z.4
copper on no net:
  other v2: 73.33,31.013 74.524,31.013 75.667,31.039 73.33,32.156 74.524,32.156 75.667,32.156 73.33,33.553 74.524,33.553 75.667,33.553
  other v3: 70.231,47.371 27.498,47.616 27.498,75.366 70.248,75.366

## Polygon pours and split planes (outlines as drawn)
GND on Signal Layer 1 "Signal Layer 1 - GND" (solid, remove dead copper, pour order 26): 21.59,45.72 24.765,48.895 24.765,77.978 26.035,79.248 28.956,79.248 30.226,77.978 30.226,48.895 33.401,45.72 64.389,45.72 67.564,48.895 67.564,77.978 68.834,79.248 71.628,79.248 72.898,77.978 72.898,46.736 65.405,39.243 65.405,22.733 73.533,14.605 92.71,14.605 96.52,10.795 96.52,3.81 92.71,0 3.81,0 0,3.81 0,9.525 37.465,9.525 37.465,28.575 34.29,31.75 34.29,39.751 0,39.751 0,41.91 3.81,45.72
3.3V on Signal Layer 2 "Signal Layer 2 - 3.3V" (solid, remove dead copper, pour order 28): 0,39.751 0,41.91 3.81,45.72 21.59,45.72 24.765,48.895 24.765,77.978 26.035,79.248 28.956,79.248 30.226,77.978 30.226,48.895 33.401,45.72 64.389,45.72 67.564,48.895 67.564,77.978 68.834,79.248 71.628,79.248 72.898,77.978 72.898,46.736 65.405,39.243 65.405,22.733 73.533,14.605 92.71,14.605 96.52,10.795 96.52,3.81 92.71,0 3.81,0 0,3.81 0,9.525 37.465,9.525 37.465,28.575 34.29,31.75 34.29,39.751

## Silkscreen, mask and mechanical layers (free items; w line width, h text height)
Top Overlay:
  the board outline again, w0.254

## Dimensions
0,43.942 to 96.52,43.942 on Top Overlay
27.4,79.8 to 27.6,-0.3 on Top Overlay